# Altium PCB PCB4.PcbDoc
Units mil, origin at the board's own origin, x right, y up, seen from the top; angles counter-clockwise.
Board outline 3160 x 980 mil, 4 copper layers (Top Layer, Layer 1, Layer 2, Bottom Layer), stack 24.956 mil thick; 40 components, 27 nets, 201 pads, 55 vias.
Unrouted connection lines stored in the file: 4.
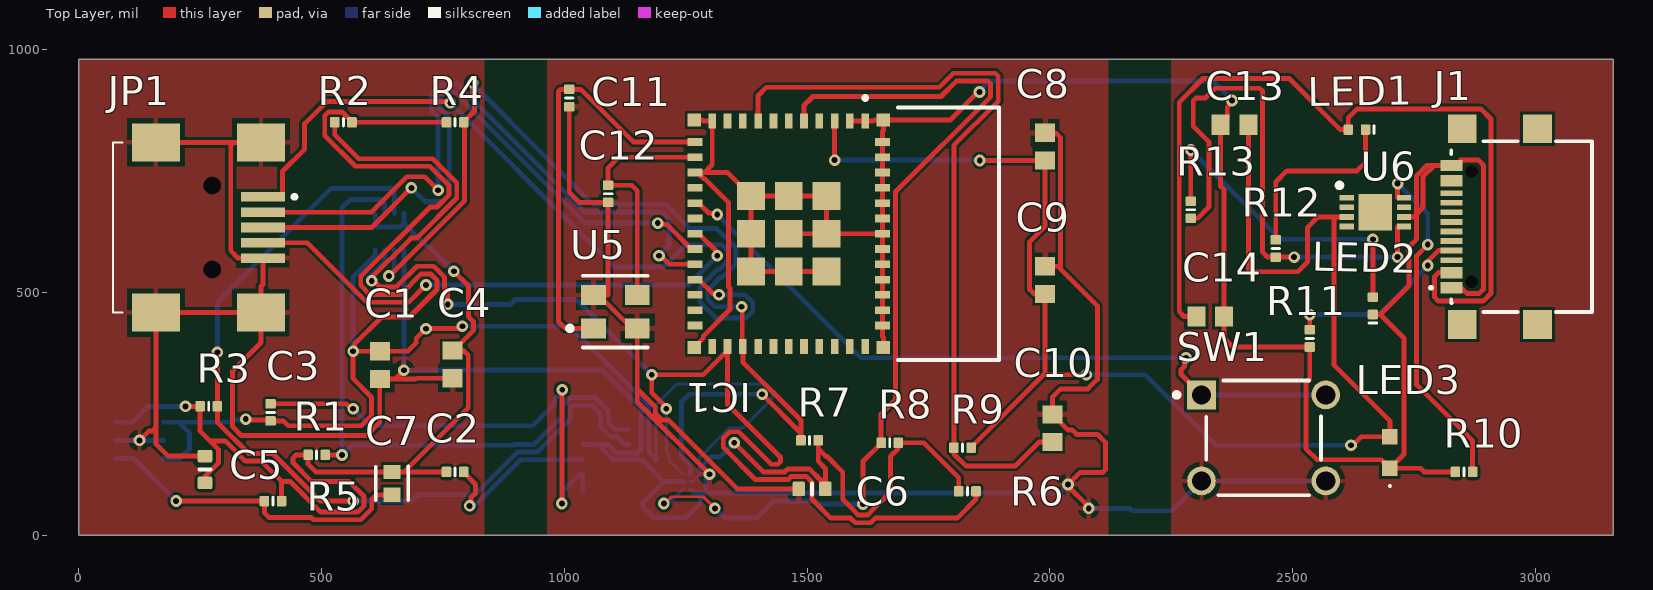
[diagram p0: Top Layer view]
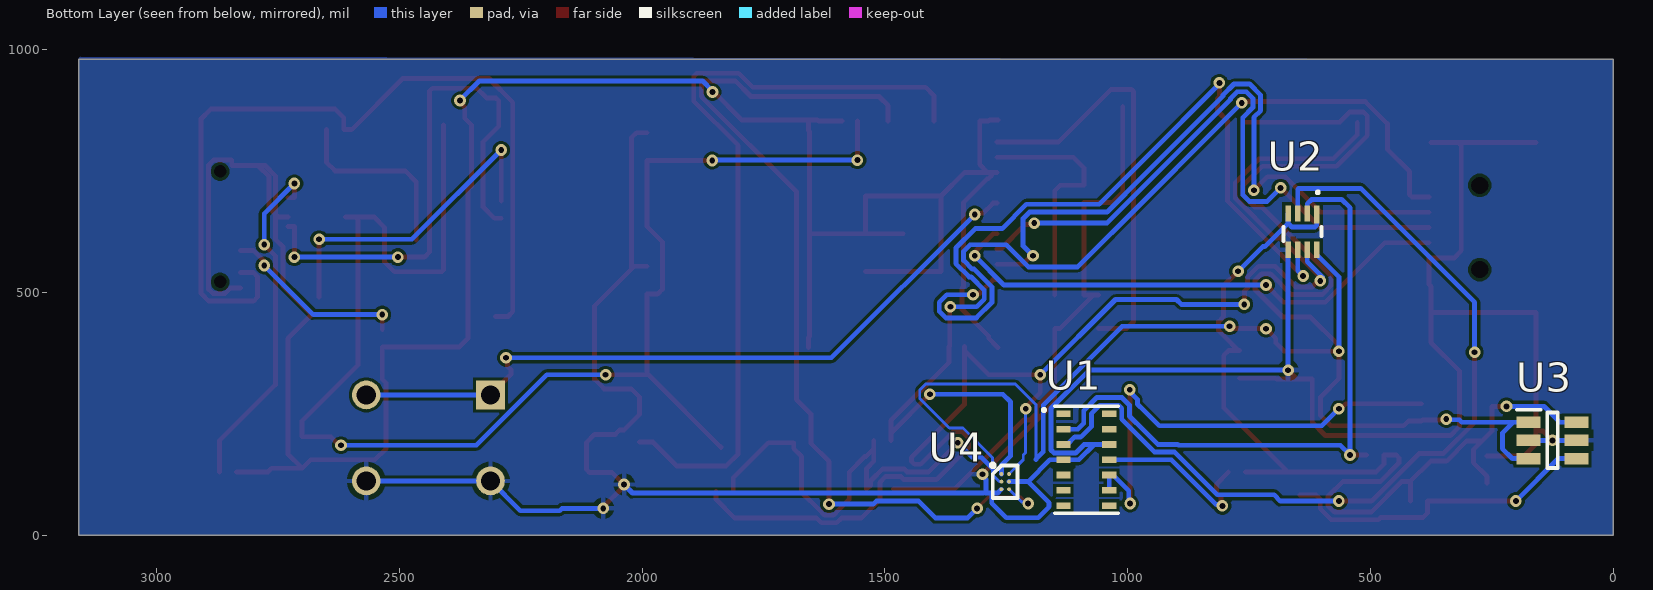
[diagram p1: Bottom Layer view, seen from below]
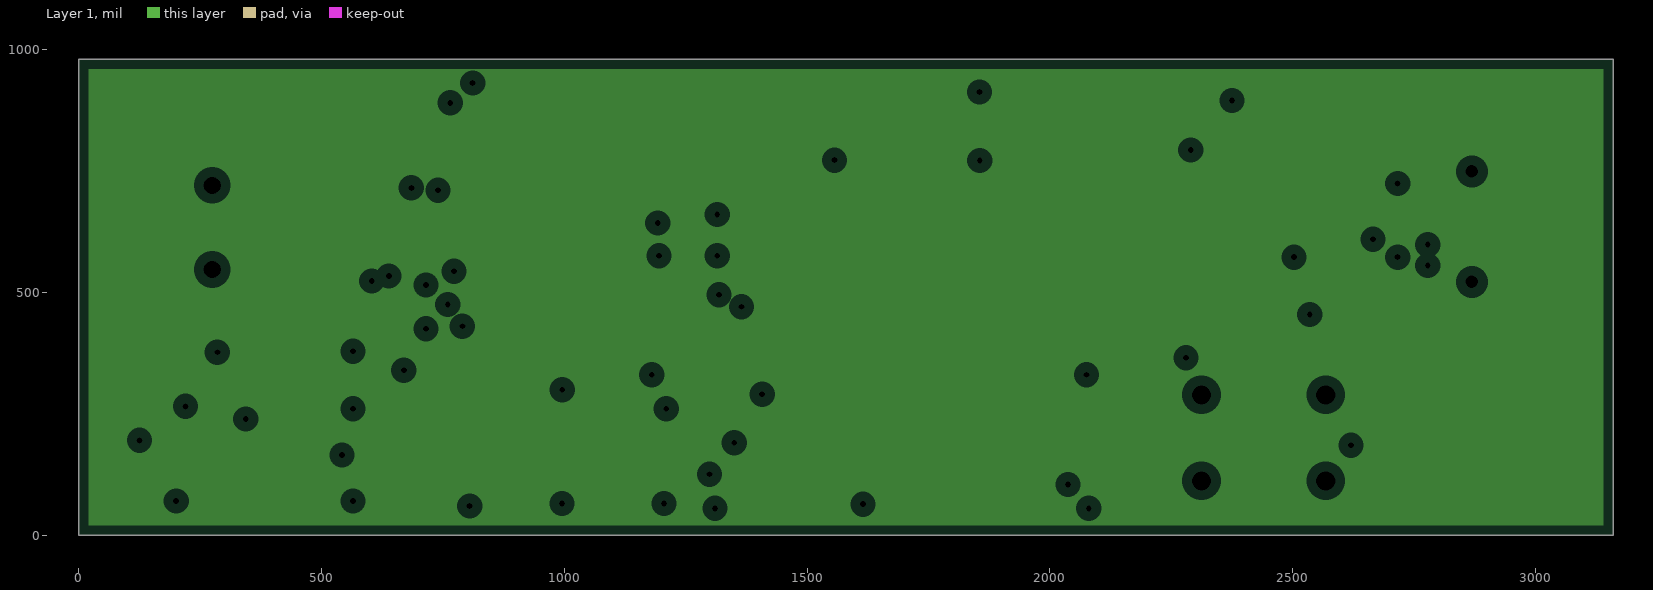
[diagram p2: Layer 1, clearances drawn from the general rule]
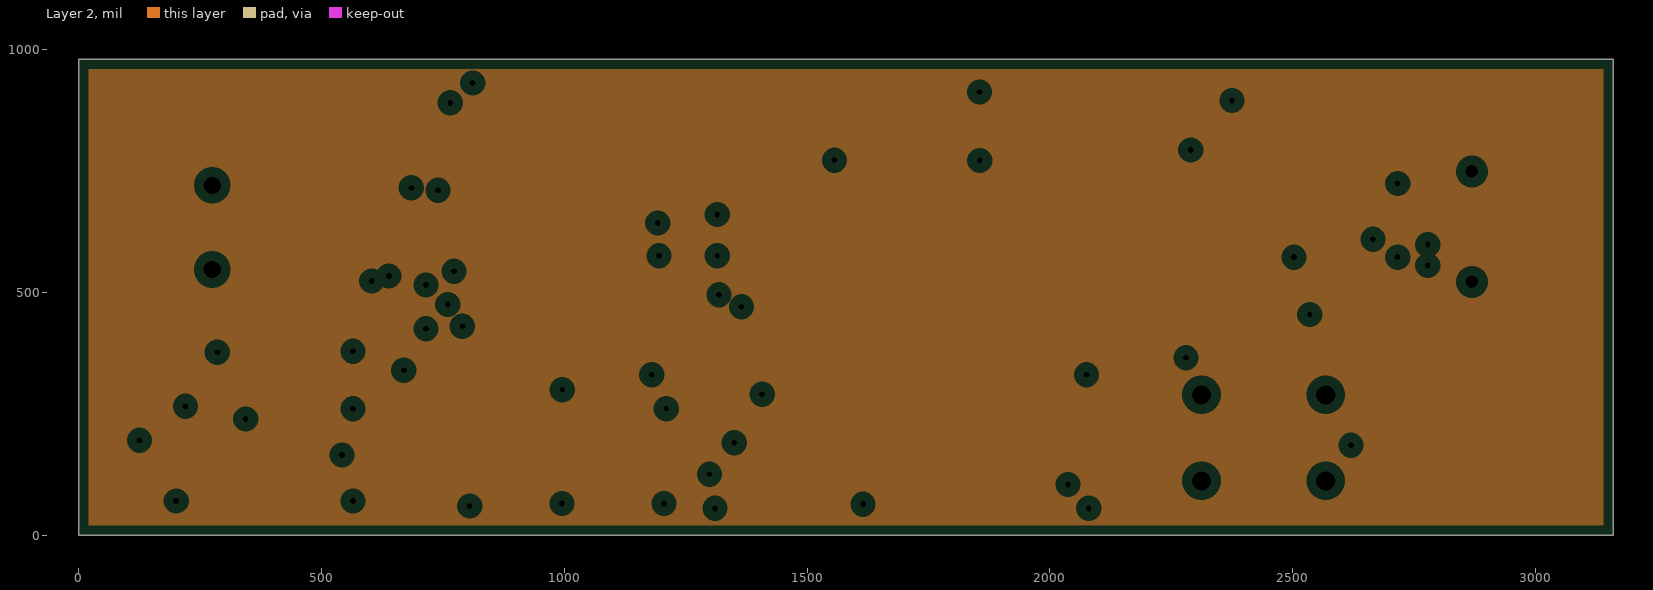
[diagram p3: Layer 2, clearances drawn from the general rule]
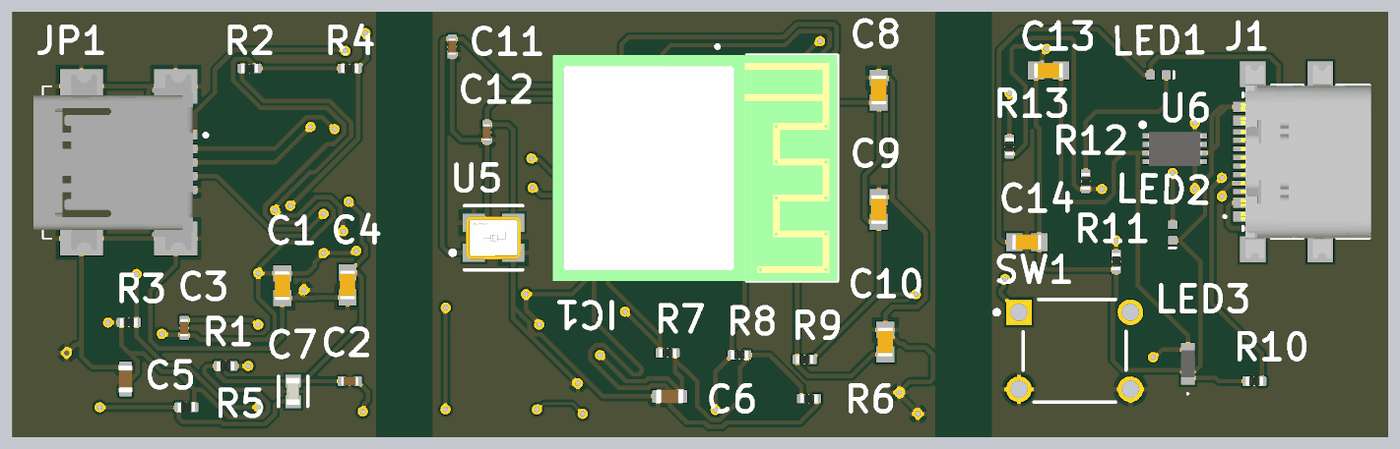
[diagram p4: 3D render of the assembled board from above, using the file's embedded part models]
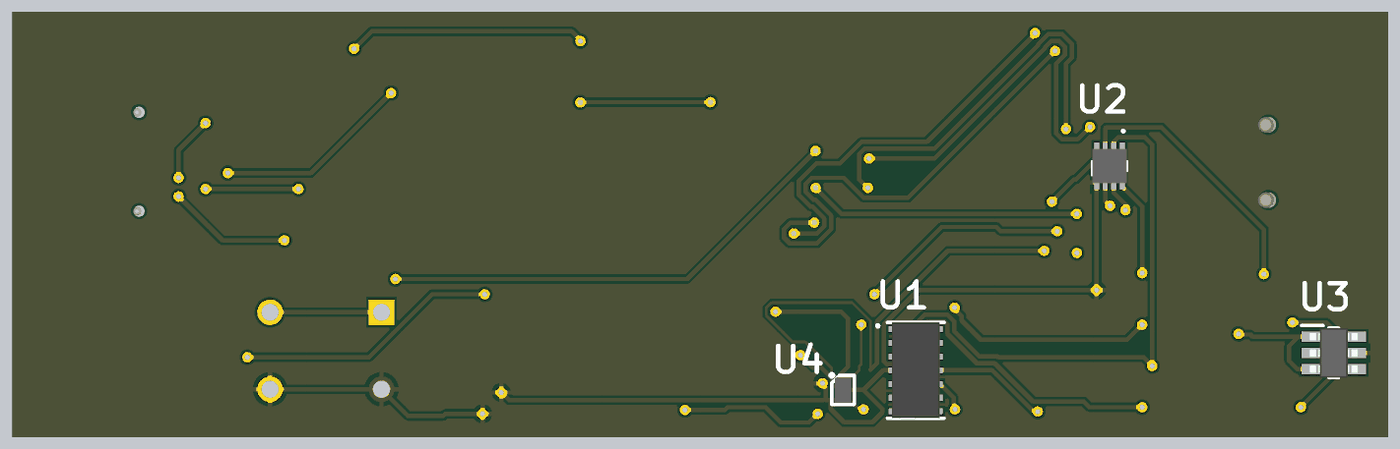
[diagram p5: 3D render of the assembled board from below, using the file's embedded part models]

## Layer stack, top to bottom
Top Solder: solder mask 0.472, FC-001, Dk 4
Top Solder: solder mask 0.4, Solder Resist, Dk 3.5
Top Layer: signal copper 2
Dielectric 2: prepreg 2.8, PP-006, Dk 4.1
Layer 1: plane copper 1.378
Dielectric 1: dielectric 12.6, FR-4, Dk 4.8
Layer 2: plane copper 1.378
Dielectric 3: prepreg 2.8, PP-006, Dk 4.1
Bottom Layer: signal copper 2
Flex Bottom Coverlay: solder mask 0.4, Solder Resist, Dk 3.5
Flex Bottom Coverlay: solder mask 0.472, FC-001, Dk 4

## Board outline
0,0 3160,0 3160,980 0,980
board region "Layer Stack R3": 845,0 0,0 0,980 845,980
board region "Layer Stack R1": 2240,980 3160,980 3160,0 2240,0
board region Flex2: 2130,980 2240,980 2240,0 2130,0
board region "Layer Stack R2": 955,980 2130,980 2130,0 955,0
board region Flex1: 845,980 955,980 955,0 845,0

## Design rules (kind name [scope] priority, off if disabled: settings)
Clearance Polygon_ANT [(InNamedPolygon('Top_Layer-GND')) or  (InNamedPolygon('Mid_Layer_1-GND')) or (InNamedPolygon('Mid_Layer_2-GND')) or (InNamedPolygon('Bottom_Layer-GND')) vs InNet('RF')] p1: gap=10 ignorepadtopadclearanceinfootprint=FALSE
Clearance Polygon [(InNamedPolygon('Top_Layer-GND')) or  (InNamedPolygon('Mid_Layer_1-GND')) or (InNamedPolygon('Mid_Layer_2-GND')) or (InNamedPolygon('Bottom_Layer-GND'))] p2: gap=10 ignorepadtopadclearanceinfootprint=FALSE except(0: Arc-Hole Track-Hole SMDPad-Hole THPad-Hole Via-Hole Fill-Hole Poly-Hole Region-Hole Text-Hole)
Clearance Clearance_Top [OnLayer('Top Layer')] p3: gap=5.71 ignorepadtopadclearanceinfootprint=FALSE except(0: Arc-Hole Track-Hole SMDPad-Hole THPad-Hole Via-Hole Fill-Hole Poly-Hole Region-Hole Text-Hole)
Clearance [All] p4: gap=5.91 ignorepadtopadclearanceinfootprint=FALSE
ComponentClearance [All] p1 off: gap=10 collisioncheckmode=3 verticalgap=10 showdistances=FALSE
DiffPairsRouting [All] p1: maxlimit=10 minlimit=10 mostfreqgap=10 toplayer_minwidth=15 toplayer_maxwidth=15 toplayer_prefwidth=15 bottomlayer_minwidth=15 bottomlayer_maxwidth=15 bottomlayer_prefwidth=15 substack1={EE8BA033-E28F-4276-8F34-0FAD93AC0668} toplayer_{ee8ba033-e28f-4276-8f34-0fad93ac0668}_minwidth=15 toplayer_{ee8ba033-e28f-4276-8f34-0fad93ac0668}_maxwidth=15 toplayer_{ee8ba033-e28f-4276-8f34-0fad93ac0668}_prefwidth=15 bottomlayer_{ee8ba033-e28f-4276-8f34-0fad93ac0668}_minwidth=15 bottomlayer_{ee8ba033-e28f-4276-8f34-0fad93ac0668}_maxwidth=15 bottomlayer_{ee8ba033-e28f-4276-8f34-0fad93ac0668}_prefwidth=15 maxuncoupledlength=500
FabricationTestPointUsage TestPointUsage [All] p1: valid=0 allowmultiple=FALSE
FabricationTestpoint Testpoint [All] p1: side=3 testpointundercomponent=TRUE minsize=40 maxsize=100 preferedsize=60 minholesize=0 maxholesize=40 preferedholesize=32 testpointgrid=1 allowsidetop=TRUE allowsidebottom=TRUE usegrid=TRUE gridtolerance=0.01
Height [All] p1 off: minheight=0 maxheight=1000 prefheight=500
HoleSize [All] p1: absolutevalues=TRUE maxlimit=396.22 minlimit=5.91 maxpercent=80.000 minpercent=20.000
MinimumAnnularRing [All] p1 off: minimumring=6
MinimumSolderMaskSliver [All] p1: minsoldermaskwidth=2
PlaneClearance [All] p1: clearance=20
PlaneConnect [All] p1: planeconnectstyle=Relief reliefexpansion=20 reliefentries=4 reliefconductorwidth=10 reliefairgap=10
PolygonConnect [All] p1: connectstyle=Relief reliefconductorwidth=10 reliefentries=4 polygonreliefangle="90 Angle" airgapwidth=10
RoutingVias [All] p1: holewidth=12 width=24 viastyle="Through Hole" minholewidth=3.94 minwidth=11.81 maxholewidth=12 maxwidth=24
SilkToSilkClearance [All] p1: silktosilkclearance=2
SilkToSolderMaskClearance SilkscreenOverComponentPads [IsPad] p1: minsilkscreentomaskgap=2 clearancetoexposedcopper=TRUE
SolderMaskExpansion [All] p1: expansion=2 istentingtop=FALSE
Width [OnLayer('Top Layer')] p1: maxlimit=20.08 minlimit=5.71 preferedwidth=10 substack1={EE8BA033-E28F-4276-8F34-0FAD93AC0668}
19 further rules are at their usual default settings.

## Classes and differential pairs
component class "Temp sensor": R6 R7 R8 U4
component class Protocol: JP1
component class Power: C13 C14 J1 LED1 LED2 LED3 R10 R11 R12 R13 U6
component class Microcontroller: C8 C9 C10 IC1 R9
component class "Heart rate and pulse oximeter": C1 C2 C3 C4 C5 C6 C7 R1 R2 R3 R4 R5 U1 U2 U3
component class "Crystal Oscillator": C11 C12 U5

## Components (designator, comment, footprint, x,y, rotation, side; value= is the part's Value field where it differs from the comment)
C1 "0.1uF" CAPC1608X90X35ML10T15 620,350 r90 top
C2 "Capacitor 1µF +/-20% 10V 0402" CAPC0402(1005)60_L 775,130 r0 top value=1µF
C3 "Capacitor 1µF +/-20% 10V 0402" CAPC0402(1005)60_L 395,252.72 r90 top value=1µF
C4 "0.1uF" CAPC1608X90X35ML10T15 770,351.46 r90 top
C5 "Capacitor 4.7µF +/-20% 10V 0603" CAPC0603(1608)100_L 260,135 r90 top value=4.7µF
C6 "Capacitor 4.7µF +/-20% 10V 0603" CAPC0603(1608)100_L 1510,95 r0 top value=4.7µF
C7 "5.6nF" FP-C0603C-CF-MFG 645,106.38 r90 top value="5,600 pF"
C8 "0.1uF" CAPC1608X90X35ML10T15 1990,800 r90 top
C9 "0.1uF" CAPC1608X90X35ML10T15 1990,525 r90 top
C10 "0.1uF" CAPC1608X90X35ML10T15 2005,220 r90 top
C11 "Capacitor 12pF +/-10% 50V 0402" CAPC0402(1005)33_L 1010,900 r90 top value=12pF
C12 "Capacitor 12pF +/-10% 50V 0402" CAPC0402(1005)33_L 1090,702.72 r90 top value=12pF
C13 "10uF" CAPC1608X90X35ML10T15 2380,845 r0 top
C14 "10uF" CAPC1608X90X35ML10T15 2330,450 r0 top
IC1 "ESP32-C3-MINI-1-H4" ESP32C3MINI1H4 1462.09,620.51 r270 top
J1 "GSB1C41110SSHR" GSB1C41110SSHR 2960,635 r90 top
JP1 "690-005-299-043" 690005299043 70.28,633.39 r0 top
LED1 "QBLP595-Y" QTB-QBLP595_V 2632.09,835 r180 top
LED2 "QBLP595-Y" QTB-QBLP595_V 2665,472.09 r90 top
LED3 "CSL1001BT1C" CSL1001BT1C 2700,170 r0 top
R1 "4D7KR2F" RESC0402(1005)_L 490,165 r0 top value=4.7k
R2 "4D7KR2F" RESC0402(1005)_L 545,850 r0 top value=4.7k
R3 "4D7KR2F" RESC0402(1005)_L 267.72,265 r0 top value=4.7k
R4 "4D7KR2F" RESC0402(1005)_L 775,850 r0 top value=4.7k
R5 "4D7KR2F" RESC0402(1005)_L 400,70 r0 top value=4.7k
R6 "Resistor 5K6  +/-5 % 0402 63 mW" RESC0402(1005)_L 1830,90 r180 top value=5.6k
R7 "Resistor 5K6  +/-5 % 0402 63 mW" RESC0402(1005)_L 1505,195 r0 top value=5.6k
R8 "Resistor 5K6  +/-5 % 0402 63 mW" RESC0402(1005)_L 1670,190 r0 top value=5.6k
R9 "Resistor 2K2  +/-5 % 0402 63 mW" RESC0402(1005)_L 1820,180 r0 top value=2.2k
R10 "2KR2J" RESC0402(1005)_L 2852.72,130 r180 top value=2k
R11 "Resistor 4K7  +/-1 % 0402 63 mW" RESC0402(1005)_L 2535,405 r90 top value=4.7k
R12 "1KR2J" RESC0402(1005)_L 2465,590 r90 top value=1k
R13 "Resistor 4K7  +/-1 % 0402 63 mW" RESC0402(1005)_L 2290,670 r90 top value=4.7k
SW1 "B3F-1000" OMRON-B3F-1000-4_V 2440,200 r0 top
U1 "MAX30102EFD+" 14-LEAD-OESIP 1085,155 r180 bottom
U2 "MAX14595ETA+" MAX14595ETA 640,625 r0 bottom
U3 "MAX1921EUT18+" SOT95P280X145-6N 125,195 r180 bottom
U4 "TMP119AIYBGR" BGA6C40P2X3_95X149X52 1252.13,110 r180 bottom
U5 "ABM8-27.120MHZ-B4-T" FP-ABM8-MFG 1105,460 r0 top
U6 "MCP73831-2DCI_MC" SON50P300X200X100-9N-D 2670,665 r0 top

## Footprints (in the part's own frame and the unit in brackets; to place one, negate y for a bottom-side part, rotate by r counter-clockwise, add the part's x,y. Pads: shape width x height; smd on the part's side, far side on the other; paste and mask are expansions set on the pad)
14-LEAD-OESIP [mm]
  rect 0.75x0.35 smd: 1(-1.2,2.4) 2(-1.2,1.6) 3(-1.2,0.8) 4(-1.2,0) 5(-1.2,-0.8) 6(-1.2,-1.6) 7(-1.2,-2.4) 8(1.2,-2.4) 9(1.2,-1.6) 10(1.2,-0.8) 11(1.2,0) 12(1.2,0.8) 13(1.2,1.6) 14(1.2,2.4)
  silkscreen extent -2.28,-2.8 1.65,2.8, body extent -1.4,-2.8 1.4,2.8, height 1.3
690005299043 [mm]
  rect 2.3x0.5 smd: 1(7.85,1.6) 2(7.85,0.8) 3(7.85,0) 4(7.85,-0.8) 5(7.85,-1.6)
  rect 2.5x2 smd: 6(7.75,-4.45) 7(7.75,4.45) 8(2.25,4.45) 9(2.25,-4.45)
  round 0.45 hole 0.9 unplated: 10(5.2,2.2) 11(5.2,-2.2)
  silkscreen extent 0,-4.45 9.6,4.45, body extent -0.54,-5.13 8.76,5.13, height 3.9
BGA6C40P2X3_95X149X52 [mm]
  round 0.2 smd: A1(-0.2,0.4) A2(0.2,0.4) B1(-0.2,0) B2(0.2,0) C1(-0.2,-0.4) C2(0.2,-0.4)
  silkscreen extent -0.75,-0.85 0.65,0.95, body extent -0.48,-0.74 0.48,0.74, height 0.53
CAPC0402(1005)33_L [mm] "Chip Capacitor, Body 1.0x0.5mm, Height 0.33mm, IPC High Density"
  rrect25% 0.5x0.55 smd: 1(-0.45,0) 2(0.45,0)
  silkscreen extent 0,-0.2 0,0.2, body extent -0.5,-0.25 0.5,0.25, height 0.55
CAPC0402(1005)60_L [mm] "Chip Capacitor, Body 1.0x0.5mm, Height 0.6mm, IPC High Density"
  rrect25% 0.5x0.55 smd: 1(-0.45,0) 2(0.45,0)
  silkscreen extent 0,-0.2 0,0.2, body extent -0.5,-0.25 0.5,0.25, height 0.6
CAPC0603(1608)100_L [mil] "Chip Capacitor, Body 1.6x0.8mm, Height 1.0mm, IPC High Density"
  rrect25% 26x29.92 smd: 1(-27.56,0) 2(27.56,0)
  silkscreen extent 0,-12 0,12, body extent -31,-16 31,16, height 37
CAPC1608X90X35ML10T15 [mm] "Chip Capacitor, 2-Leads, Body 1.7x0.9mm, IPC Low Density"
  rect 0.95x1.05 smd: 1(-0.725,0) 2(0.725,0)
  body extent -0.85,-0.45 0.85,0.45, height 0.9
CSL1001BT1C [mm]
  rect 0.8x0.8 smd: 1(0,-0.825) 2(0,0.825)
  silkscreen extent -0.05,-1.8 0.05,-1.7, body extent -0.4,-0.8 0.4,0.8, height 1.26
ESP32C3MINI1H4 [mm]
  rect 0.8x0.4 smd: 1(-5.9,4) 2(-5.9,3.2) 3(-5.9,2.4) 4(-5.9,1.6) 5(-5.9,0.8) 6(-5.9,0) 7(-5.9,-0.8) 8(-5.9,-1.6) 9(-5.9,-2.4) 10(-5.9,-3.2) 11(-5.9,-4) 25(5.9,-4) 26(5.9,-3.2) 27(5.9,-2.4) 28(5.9,-1.6) 29(5.9,-0.8) 30(5.9,0) 31(5.9,0.8) 32(5.9,1.6) 33(5.9,2.4) 34(5.9,3.2) 35(5.9,4)
  rect 0.4x0.8 smd: 12(-4.8,-4.9) 13(-4,-4.9) 14(-3.2,-4.9) 15(-2.4,-4.9) 16(-1.6,-4.9) 17(-0.8,-4.9) 18(0,-4.9) 19(0.8,-4.9) 20(1.6,-4.9) 21(2.4,-4.9) 22(3.2,-4.9) 23(4,-4.9) 24(4.8,-4.9) 36(4.8,4.9) 37(4,4.9) 38(3.2,4.9) 39(2.4,4.9) 40(1.6,4.9) 41(0.8,4.9) 42(0,4.9) 43(-0.8,4.9) 44(-1.6,4.9) 45(-2.4,4.9) 46(-3.2,4.9) 47(-4,4.9) 48(-4.8,4.9)
  rect 1.45x1.45 smd: 49(0,0) 50(1.975,1.975) 51(0,1.975) 52(-1.975,1.975) 53(-1.975,0) 54(-1.975,-1.975) 55(0,-1.975) 56(1.975,-1.975) 57(1.975,0)
  rect 0.7x0.7 smd: 58(-5.95,4.95) 59(-5.95,-4.95) 60(5.95,-4.95) 61(5.95,4.95)
  silkscreen extent -7.2,3.9 6.6,11, body extent -6.6,-5.6 6.6,11, height 2.4
FP-ABM8-MFG [mm]
  rect 1.3x1.05 smd paste+0 mask+0: 1(-1.15,-0.875) 2(1.15,-0.875) 3(1.15,0.875) 4(-1.15,0.875)
  silkscreen extent -2.5,-1.87 1.7,1.87, body extent -1.9,-1.5 1.9,1.5, height 0.25
FP-C0603C-CF-MFG [mm]
  rect 0.75x0.9 smd paste+0 mask+0: 1(-0.6,0) 2(0.6,0)
  silkscreen extent -0.87,-0.85 0.88,0.85, body extent -1.2,-0.6 1.2,0.6, height 0.25
GSB1C41110SSHR [mm]
  rect 0.6x1.15 smd: A1(-3.2,3.39) A4(-2.4,3.39) A9(2.4,3.39) A12(3.2,3.39)
  rect 0.3x1.15 smd: A5(-1.25,3.39) A6(-0.25,3.39) A7(0.25,3.39) A8(1.25,3.39) B5(1.75,3.39) B6(0.75,3.39) B7(-0.75,3.39) B8(-1.75,3.39)
  round 0.325 hole 0.65 unplated: MH1(-2.89,2.315) MH2(2.89,2.315)
  rect 1.5x1.5 smd: MP1(-5.12,2.815) MP2(5.12,2.815) MP3(-5.12,-1.115) MP4(5.12,-1.115)
  silkscreen extent -4.47,-3.96 4.47,4.5, body extent -5.67,-4.09 5.67,3.51, height 3.12
MAX14595ETA [mm]
  rect 0.3x0.95 smd: 1(-0.75,-0.9)
  rect 0.3x0.85 smd: 2(-0.25,-0.95) 3(0.25,-0.95) 4(0.75,-0.95) 5(0.75,0.95) 6(0.25,0.95) 7(-0.25,0.95) 8(-0.75,0.95)
  silkscreen extent -1,-2.1 1,0.5, body extent -1,-1 1,1, height 0.9
OMRON-B3F-1000-4_V [mm] "TH, 4-Leads, Body 6x6mm"
  rect 1.5x1.5 hole 1 paste-2539.97: 1(-3.25,2.25)
  round 1.5 hole 1 paste-2539.97: 2(3.25,2.25) 4(3.25,-2.25)
  round 1.5 hole 1 paste-2539.97 mask+0.102: 3(-3.25,-2.25)
  silkscreen extent -4.67,-3 3,3, body extent -3,-3 3,3, height 4.5
QTB-QBLP595_V [mm] "SMD, 2-Leads, Body 1x0.5mm"
  rrect25% 0.5x0.55 smd: 1(-0.455,0) 2(0.455,0)
  silkscreen extent -0.9,-0.2 -0.9,0.2, body extent -0.5,-0.25 0.5,0.25, height 0.5
RESC0402(1005)_L [mm] "Chip Resistor, Body 1.0x0.5mm, IPC High Density"
  rrect25% 0.5x0.55 smd: 1(-0.45,0) 2(0.45,0)
  silkscreen extent 0,-0.2 0,0.2, body extent -0.5,-0.25 0.5,0.25, height 0.3
SON50P300X200X100-9N-D [mm]
  rect 0.75x0.3 smd: 1(-1.5,0.75) 2(-1.5,0.25) 3(-1.5,-0.25) 4(-1.5,-0.75) 5(1.5,-0.75) 6(1.5,-0.25) 7(1.5,0.25) 8(1.5,0.75)
  rect 1.75x1.9 smd: 9(0,0)
  silkscreen extent -2,1.28 -1.75,1.52, body extent -1.55,-1 1.55,1, height 1
SOT95P280X145-6N [mm]
  rect 1.25x0.6 smd: 1(-1.25,0.95) 2(-1.25,0) 3(-1.25,-0.95) 4(1.25,-0.95) 5(1.25,0) 6(1.25,0.95)
  silkscreen extent -1.87,-1.45 0.27,1.6, body extent -1.4,-1.45 1.4,1.45, height 1.45

## Part data
C1 C4 C8 C9 C10 C13 C14: library part CMP-2100-03643-1, "Chip Capacitor, 0.1 uF, +/- 10%, 50 V, -55 to 125 degC, 0603 (1608 Metric), RoHS, Tape and Reel", Capacitance=100nF, Case Code (Imperial)=0603, Case Code (Metric)=1608, Dielectric=X7R, Dielectric Material=Ceramic, Insulation Resistance=10GR, Manufacturer=Murata, Max Operating Temperature=125degC, Min Operating Temperature=-55degC, Package Description="2-Pin Surface Mount Device, Body 1.6 x 0.8 mm", Package Quantity=1, Tolerance=10%, Voltage=50V, Case/Package=0603, Contact Plating=Tin, Datasheet URL=http://psearch.en.murata.com/capacitor/product/GRM188R71H104KA93%23.pdf, Datasheet Version=42675.0, Depth=0.8mm, Height=0.8mm, Lead Free=LeadFree, Length=1.6mm, Manufacturer URL=http://www.murata.com/, Material=Ceramic, Mount=SurfaceMount, Number of Pins=2, Package Reference=0603, Packaging=TapeandReel, Radiation Hardening=No, REACH SVHC=NoSVHC, RoHSCompliant=true, Termination=SMD/SMT, Thickness=0.035inch, Voltage Rating=50V, Voltage Rating (DC)=50V, Width=0.8mm
C2 C3: library part CMP-001-00063-3, "Chip Capacitor, 1µF +/-20%, 10V, 0402, Thickness 0.6 mm", Case/Package=0402, Max Operating Temperature=85°C, Min Operating Temperature=-55°C, Tolerance=10%, Voltage Rating=10V, Mounting Technology=SMT, Pins=2
C5 C6: library part CMP-001-00076-4, "Chip Capacitor, 4.7µF +/-20%, 10V, 0603, Thickness 1 mm", Case/Package=0603, Max Operating Temperature=85°C, Min Operating Temperature=-55°C, Tolerance=10%, Voltage Rating=10V, Mounting Technology=SMT, Pins=2
C7: library part CMP-2006-03359-2, "CAP CER 5600PF 50V NP0 0603", Capacitance="5,600 pF", Manufacturer=KEMET, Manufacturer Part Number=C0603C562J5GACTU, Package=C0603C-CF, Temperature="-55°C to +125°C", Temperature Characteristic=C0G, Temperature Coefficient=30ppm/°C, Temperature Range High=+125°C, Temperature Range Low=-55°C, Tolerance=0.05, Voltage Rating="50 V", Automotive=Yes, Automotive Grade="Grade 1", Category=Cap, ComponentLink2Description=Datasheet, ComponentLink2URL=https://api.kemet.com/component-edge/download/datasheet/C0603C100J5GACAUTO.pdf, Device Class L1="Passive Components", Device Class L2=Capacitors, Device Class L3="Ceramic Capacitors", Digikey Description="CAP CER 5600PF 50V NP0 0603", Height=0.87mm, Lead Free=Yes, Material=Ceramic, Mouser Description="Multilayer Ceramic Capacitors MLCC - SMD/SMT 50volts 5600pF 5% C0G", Octopart=https://octopart.com/c0603c562j5gactu-kemet-13174209, RoHS=TRUE
C11 C12: library part CMP-001-00072-4, "Chip Capacitor, 12pF +/-10%, 50V, 0402, Thickness 0.33 mm", Case/Package=0402, Max Operating Temperature=85°C, Min Operating Temperature=-55°C, Tolerance=20%, Voltage Rating=50V, Mounting Technology=SMT, Pins=2
IC1: "Integrated Circuit", Manufacturer_Name="Espressif Systems", Mouser Part Number=356-ESP32-C3-MINI1H4, Datasheet Link=https://www.mouser.es/datasheet/2/891/Espressif_ESP32_C3_MINI_1_Datasheet-2006822.pdf, Height=2.55mm, Manufacturer_Part_Number=ESP32-C3-MINI-1-H4, Mouser Price/Stock=https://www.mouser.co.uk/ProductDetail/Espressif-Systems/ESP32-C3-MINI-1-H4?qs=stqOd1AaK78JkwNX13Q9hQ%3D%3D
J1: "Connector", Manufacturer_Name="Amphenol Communications Solutions", Datasheet Link=https://cdn.amphenol-cs.com/media/wysiwyg/files/drawing/gsb1c41x10sshr-ax1.pdf, Height=3.41mm, Manufacturer_Part_Number=GSB1C41110SSHR
JP1: "Connector", Manufacturer_Name=EDAC, Mouser Part Number=587-690-005-299-043, Datasheet Link=https://datasheet.datasheetarchive.com/originals/distributors/Datasheets-DGA2/216278.pdf, Height=3.98mm, Manufacturer_Part_Number=690-005-299-043, Mouser Price/Stock=https://www.mouser.co.uk/ProductDetail/EDAC/690-005-299-043?qs=Vpv2%252BhtnxQIs8OWWDFbyVg%3D%3D
LED1 LED2: library part CMP-007-00043-3, "Chip LED 0402, Yellow, 0.02 A, 3.1 to 3.7 V, -40 to 80 degC, 2-Pin SMD, RoHS, Tape and Reel", Case/Package=0402, Colour=Yellow, Mounting Technology=SMT, Pins=2, RoHS Compliant=Yes
LED3: "LED", Manufacturer_Name="ROHM Semiconductor", Mouser Part Number=755-CSL1001BT1C, Datasheet Link=https://fscdn.rohm.com/en/products/databook/datasheet/opto/led/chip_mono/csl1001bt1(c)-e.pdf, Height=1.16mm, Manufacturer_Part_Number=CSL1001BT1C, Mouser Price/Stock=https://www.mouser.co.uk/ProductDetail/ROHM-Semiconductor/CSL1001BT1C?qs=HoCaDK9Nz5fqNTX3Pg0ReA%3D%3D
R1 R2 R3 R4 R5: library part CMP-009-00105-2, "4K7 0.063W 1% 0402 (1005 Metric)  SMD", Case/Package=0402, Power=63mW, Tolerance=1%, Mounting Technology=SMT, Pins=2
R6 R7 R8: library part CMP-009-00136-3, "Chip Resistor, 5,6 kOhms, +/-5 %, 63 mW, -55 to 155 degC, 0402", Case/Package=0402, Max Operating Temperature=155°C, Min Operating Temperature=-55°C, Power=63mW, Tolerance=5%, Pins=2
R9: library part CMP-009-00166-3, "Chip Resistor, 2,2 kOhms, +/-5 %, 63 mW, -55 to 155 degC, 0402", Case/Package=0402, Max Operating Temperature=155°C, Min Operating Temperature=-55°C, Power=63mW, Tolerance=5%, Pins=2
R10: library part CMP-009-00091-2, "2K 0.063W 5% 0402 (1005 Metric)  SMD", Case/Package=0402, Power=63mW, Tolerance=5%, Mounting Technology=SMT, Pins=2
R11 R13: library part CMP-009-00158-3, "Chip Resistor, 4,7 kOhms, +/-1 %, 63 mW, -55 to 155 degC, 0402", Case/Package=0402, Max Operating Temperature=155°C, Min Operating Temperature=-55°C, Power=63mW, Tolerance=1%, Pins=2
R12: library part CMP-009-00075-2, "1K 0.063W 5% 0402 (1005 Metric)  SMD", Case/Package=0402, Power=63mW, Tolerance=5%, Mounting Technology=SMT, Pins=2
SW1: library part CMP-1677-00002-1, "Tactile Switch, SPST-NO, 0.05 A, 5 to 24 V, -25 to 70 degC, 4-Pin THD, RoHS, Bulk", Capacitance="-45 f", Current Rating="1.5 A", Max Operating Temperature="70 degC", Min Operating Temperature="-40 degC", Package Quantity=1080, Voltage Rating="150 V", ComponentLink1Description="Manufacturer URL", ComponentLink1URL=http://www.omron.com/, ComponentLink2Description=Datasheet, ComponentLink2URL=http://www.omron.com/ecb/products/pdf/en-b3f.pdf, Contact Material=Brass, Contact Plating=Gold, DatasheetVersion=Jan-15, Gender=Female, Height="14.99 mm", Lead Pitch="1.27 mm", Length="18.34 mm", Mount="Through Hole", PackageDescription="4-Pin Through Hole Device, Body 6 x 6 mm", PackageReference=B3F-1000, Packaging=Tray, Pins=8, Radiation Hardening=No, RoHSCompliant=true, Shielding=Shielded, Width="25.4 mm"
U1: "Integrated Circuit", Manufacturer_Name="Analog Devices", Mouser Part Number=700-MAX30102EFD+, Datasheet Link=https://datasheets.maximintegrated.com/en/ds/MAX30102.pdf, Manufacturer_Part_Number=MAX30102EFD+, Mouser Price/Stock=https://www.mouser.co.uk/ProductDetail/Analog-Devices-Maxim-Integrated/MAX30102EFD%2b?qs=nVS1qgv%252BQrk9UYEvS27V%2Fg%3D%3D
U2: "Integrated Circuit", Manufacturer_Name="Analog Devices", Mouser Part Number=700-MAX14595ETA+, Datasheet Link=https://www.mouser.it/datasheet/2/256/MAX14595-471922.pdf, Height=0.8mm, Manufacturer_Part_Number=MAX14595ETA+, Mouser Price/Stock=https://www.mouser.co.uk/ProductDetail/Maxim-Integrated/MAX14595ETA%2b?qs=Or6ezLSzmEvDejm1TC8ZVA%3D%3D
U3: "Integrated Circuit", Manufacturer_Name="Analog Devices", Datasheet Link=https://datasheet.datasheetarchive.com/originals/distributors/SFDatasheet-4/sf-00087114.pdf, Height=1.45mm, Manufacturer_Part_Number=MAX1921EUT18+
U4: "Integrated Circuit", Manufacturer_Name="Texas Instruments", Mouser Part Number=595-TMP119AIYBGR, Datasheet Link=https://www.ti.com/lit/ds/symlink/tmp119.pdf?ts=1711471230059&ref_url=https%253A%252F%252Fwww.ti.com%252Fsitesearch%252Fen-us%252Fdocs%252Funiversalsearch.tsp%253FlangPref%253Den-US%2526searchTerm%253Dtmp119%2526nr%253D70, Height=0.525mm, Manufacturer_Part_Number=TMP119AIYBGR, Mouser Price/Stock=https://www.mouser.co.uk/ProductDetail/Texas-Instruments/TMP119AIYBGR?qs=dbcCsuKDzFUz%2FSabBerKMA%3D%3D
U5: library part CMP-27762-000994-1, "Crystal 27.12MHz ±30ppm 18pF SMD-4 3.2mm x 2.5mm", Capacitance=1.8E-11F, Case/Package=SMD/SMT, ESR (Equivalent Series Resistance)=50R, Frequency=27.12MHz, Frequency Stability=50ppm, Frequency Tolerance=30ppm, Load Capacitance=18pF, Max Operating Temperature=70°C, Min Operating Temperature=-20°C, Height=0.031inch, Lead Free="Lead Free", Length=0.126inch, Mount="Surface Mount", Packaging="Tape and Reel", RoHS Compliant=Yes, Width=0.098inch
U6: "Integrated Circuit", Arrow Part Number=MCP73831-2DCI/MC, Manufacturer_Name=Microchip, Mouser Part Number=579-MCP73831-2DCI/MC, Arrow Price/Stock=https://www.arrow.com/en/products/mcp73831-2dcimc/microchip-technology?region=nac, Datasheet Link=https://www.arrow.com/en/products/mcp73831-2dcimc/microchip-technology, Height=1mm, Manufacturer_Part_Number=MCP73831-2DCI/MC, Mouser Price/Stock=https://www.mouser.co.uk/ProductDetail/Microchip-Technology/MCP73831-2DCI-MC?qs=hH%252BOa0VZEiBQ%2FrptDRXKdg%3D%3D

## Via types
v1: diameter 24, hole 12, Top Layer to Bottom Layer, 55 vias

## Nets (pads, with @x,y where several pads share a name; then routed paths per layer and width w, separated by ;. In a path a pad name is that pad's centre, name@x,y a point inside that pad or via, vN(x,y) a via of type N, cw(c..) or ccw(c..) an arc to the next point about the centre after c; other vN are vias at no path point)
1.8V: C2.1 C4.2 C5.1 C7.2 R1.1 R3.1 R5.2 U2.1 U2.4 U3.6 | length 2123.5
  Top Layer w10: v1(220,265) R3.1 250,214 270,194 ; C5.1 260,121 288,149 288,176 270,194 ; R5.2 417.72,110.5 ; C2.1 670,130 ; C4.2 792,380 802,370 802,262 670,130 ; C4.2@771.97,380 799.26,407.29 799.41,407.29 812.71,420.59 812.71,439.41 802.71,449.41 802.71,512.99 v1(772.54,543.16) ; 270,194 301.57,194 343.32,152.25 375.97,152.25 417.72,110.5 ; 417.72,110.5 435.07,110.5 498.28,47.29 574.41,47.29 587.71,60.59 587.71,79.41 557.11,110 480,110 441.58,148.42 441.58,159.14 447.44,165 R1.1 472.28,146 488.28,130 C7.2 670,130
  Bottom Layer w10: U3.6 110,232.4 142.6,265 v1(220,265) ; U2.1 610.47,638 614.47,634 661.53,634 669.53,642 ; U2.4 669.53,642 ; v1(772.54,543.16) 721.78,593.92 717.61,593.92 669.53,642
CHIP_EN: C10.1 IC1.8 R9.1 | length 1617.4
  Top Layer w10: IC1.8 1399.09,905.09 1416,922 1772.25,922 1801.16,950.91 1887.56,950.91 1893.42,945.05 1893.42,893.42 1802.28,802.28 R9.1 1802.28,166.92 1827.21,142 1928,142 1977.46,191.46 C10.1
GND: C1.1 C4.1 C5.2 C6.1 C8.2 C9.2 C10.2 C11.1 C12.1 JP1.5 JP1.6 JP1.7 JP1.8 JP1.9 SW1.3 SW1.4 U1.4 U1.12 U2.5 U3.2 U3.5 U4.B2 U4.C1 U5.2 U5.4 | length 7450.4
  Top Layer w10: v1(125,195) 144.13,214.13 151.13,214.13 158.86,221.86 ; JP1.8 319.58,808.58 ; C5.2 184,162.56 158.86,187.7 158.86,221.86 ; JP1.7 319.58,808.58 ; v1(669.53,339.53) 651.46,321.46 ; C4.1 695.46,322.91 694,321.46 651.46,321.46 ; C11.1 1010,706 1031,685 C12.1 1090,494.45 U5.4@1070,494.45 ; U5.4 U5.4@1070,494.45 ; v1(1299.01,125.26) 1150.28,274 1150.28,300.72 ; C6.1 1356,95 1213.71,237.29 1200.59,237.29 1187.29,250.59 1187.29,263.71 1150.28,300.72 ; C9.2 2016,553.54 2022,547.54 ; C8.2 2011.46,828.54 2022,818 2022,547.54 ; v1(2080,55) 2080,58 2037,101 v1(2037,104) 2061.64,128.64 2108.43,128.64 2114.29,134.49 2114.29,190.71 2097.84,207.16 2054.95,207.16 2045.57,216.54 2037,216.54 C10.2 2005,284 2022,301 2078.11,301 2097.71,320.59 2097.71,471.84 2022,547.54 ; 158.86,221.86 JP1.9 JP1.6 ; 319.58,808.58 313,802 313,585.39 328,570.39 JP1.5 379.33,515.94 375.39,512 JP1.6 ; JP1.6 375.39,396.39 317,338 317,223 335,205 593,205 620,232 C1.1 651.46,321.46 ; U5.4@1070,494.45 1138.9,425.55 U5.2 1150.28,300.72
  Bottom Layer w10: U3.5 U3.2 ; U2.5 v1(669.53,339.53) 1079.28,339.53 1157.91,260.89 1157.91,175.09 1151.53,168.7 1107.48,168.7 1089.68,186.5 1069,186.5 ; U1.12 1069,186.5 ; U4.B2 1205,110 ; U4.C1 1267.67,86.58 1280,86.58 ; 1296.85,86.58 2019.58,86.58 v1(2037,104) ; v1(1299.01,125.26) 1299.01,121.48 1292.01,114.48 1292.01,86.58 1280,86.58 ; v1(2080,55) 2125,55 2164.71,55 2169.71,50 2245,50 2250.63,50 SW1.3 SW1.4 ; 1069,186.5 1100.5,155 U1.4 1160,155 1205,110 ; 1205,110 1161.64,66.64 1161.64,58.36 1184.31,35.69 1250.02,35.69 1280,65.67 1280,86.58
GPIO2: IC1.5 R8.1 U4.C2 | length 1916.2
  Top Layer w6: v1(1205,65) 1207.08,65 1220.89,78.81 1286.19,78.81 v1(1310,55)
  Top Layer w10: IC1.5 1493.58,884.75 1512,903.16 1775.63,903.16 1807.67,935.2 1871.85,935.2 1877.71,929.35 1877.71,902.71 1682,707 1682,279 1652.28,249.28 R8.1 1652.28,189.02 1615,151.73 v1(1615,63.67)
  Bottom Layer w6: v1(1205,65) 1208.44,68.44 1218.44,68.44 U4.C2
  Bottom Layer w10: v1(1310,55) 1330,35 1395.61,35 1430.61,70 1517.75,70 1524.07,63.67 v1(1615,63.67)
GPIO18: IC1.26 R2.1 R6.1 U2.7 U4.A2 | length 2918.4
  Top Layer w10: R2.1 527.28,824.17 576.41,775.04 729.29,775.04 778.42,725.91 778.42,694.09 695.77,611.44 684.33,611.44 601.68,528.79 v1@601.68,521.68 ; v1(603.42,523.42) 607.21,523.42 619.71,510.91 654.06,510.91 696.56,553.42 730.91,553.42 753.42,530.91 753.42,508.14 759.56,502 759.56,475.44 v1(760,475) ; v1(1210,260) 1210,263.22 1180,293.22 v1(1180,330) 1285.75,330 IC1.26@1336.1,380.35 ; IC1.26 IC1.26@1336.1,380.35 ; R6.1 1847.72,74 1808.72,35 1640.66,35 1630.91,25.26 1599.09,25.26 1589.34,35 1549,35 1510,74 1510,108.64 1497.97,120.67 1466.91,120.67 1460.53,114.29 1393.59,114.29 1327.29,180.59 1327.29,199.41 1340.59,212.71 1359.41,212.71 1426.41,145.71 1439.29,145.71 1445.15,151.57 1445.15,159.85 1336.1,268.9 IC1.26@1336.1,380.35
  Bottom Layer w6: v1(1210,260) 1210,170 1215,165 1215,155 U4.A2
  Bottom Layer w10: v1(603.42,523.42) 603.42,527.21 599,531.62 599,531.84 630.16,563 U2.7 ; v1(760,475) 835,475 889.39,475 899.39,485 965,485 1025,485 v1(1180,330)
GPIO19: IC1.27 R4.2 R7.1 U2.6 U4.A1 | length 2192.6
  Top Layer w10: v1(638.62,533.62) 640.17,533.62 794.13,687.58 794.13,848.59 R4.2 ; R4.2@792.72,850.98 815,873.27 815,898.38 811.14,902.24 v1(811.14,931.14) ; v1(1365,470) 1366.3,468.7 1366.3,389.53 IC1.27 1367.6,356 1487.28,236.31 1487.28,210 ; v1(1407.28,290) 1487.28,210 ; R7.1 1487.28,210
  Bottom Layer w10: v1(638.62,533.62) 649.84,544.84 U2.6 ; v1(811.14,931.14) 811.14,928.86 965,775 1058.8,681.2 1208.47,681.2 1258.66,631.01 1313.87,631.01 1353.81,591.08 1353.81,558.92 1326.59,531.71 1322.65,531.71 1295.43,504.49 1295.43,485.51 1310.95,470 v1(1365,470) ; U4.A1 1260,144 1241,163 1241,274 1257,290 v1(1407.28,290)
NetC2_2: C2.2 U1.11 | length 357.2
  Top Layer w10: C2.2 792.72,129.02 817.09,104.64 817.09,85.88 807.68,76.47 807.68,62.68 v1(805,60)
  Bottom Layer w10: v1(805,60) 807.68,62.68 817.68,62.68 910,155 965,155 U1.11
NetC3_2: C3.2 U1.9 U1.10 | length 1005.2
  Top Layer w10: C3.2 550.78,270.43 561.21,260 v1(565,260) ; v1(995,65) 995,298.69 v1(995.65,299.35)
  Bottom Layer w10: v1(565,260) 600,225 835,225 935,225 965,255 979.87,269.87 979.87,279.78 995.65,295.56 v1(995.65,299.35) ; v1(995,65) 997.68,67.68 997.68,91.3 1029.88,123.5 U1.10 U1.9
NetC7_1: C7.1 R5.1 U3.4 | length 668.4
  Top Layer w10: v1(200.6,70) R5.1 382.28,45.72 392,36 479,36 483.42,31.58 580.91,31.58 603.42,54.09 603.42,73.89 612.28,82.76 C7.1
  Bottom Layer w10: U3.4 113,157.6 v1(200.6,70)
NetC13_1: C13.1 C14.2 IC1.1 IC1.2 IC1.11 IC1.14 IC1.36 IC1.37 IC1.38 IC1.39 IC1.40 IC1.41 IC1.42 IC1.43 IC1.44 IC1.45 IC1.46 IC1.47 IC1.48 IC1.49 IC1.50 IC1.51 IC1.52 IC1.53 IC1.54 IC1.55 IC1.56 IC1.57 IC1.58 IC1.59 IC1.60 IC1.61 J1.A1 J1.A12 LED2.1 LED3.1 R10.2 R11.1 U6.6 | length 5295.4
  Top Layer w10: IC1.60 1286.02,405.08 1286.02,409.62 1341.05,464.64 1341.05,507.74 1337.71,511.08 1337.71,685.23 1289.36,733.58 1286.8,733.58 1279.92,740.46 1279.92,743.62 IC1.14@1277.05,746.5 ; IC1.59 1284,854.76 1285.97,852.8 IC1.11 1304.61,763.1 1288,746.5 ; IC1.14 IC1.14@1277.05,746.5 ; IC1.49 IC1.51 ; IC1.50 IC1.57 IC1.56 IC1.55 IC1.54 ; IC1.2 IC1.1 1637,852.8 1638.97,854.76 IC1.58 ; IC1.61 1656.97,407 1655,408.97 IC1.36 IC1.37 IC1.38 IC1.39 IC1.40 IC1.41 IC1.42 ; v1(1855,912.5) 1852.5,912.5 1794.76,854.76 IC1.58 ; v1(2375,895) 2375,891.21 2365.16,881.37 2365.16,858.7 C13.1 2351.46,718.01 2358.54,710.92 C14.2 2358.54,404.74 2376,387.28 R11.1 2535,321 2527,313 2527,178 2550,155 2682.52,155 LED3.1 ; LED2.1 2680.22,454.17 ; U6.6 2749.16,655.16 2755,661 ; J1.A1 2847,509.02 2858.5,497.52 2884.08,497.52 2892.56,506 2892.56,762 2882.08,772.48 2845,772.48 2845,760.98 J1.A12 2790.98,760.98 ; R10.2 2770.52,130 2763,137.52 LED3.1 ; IC1.14@1277.05,746.5 1288,746.5 ; 1288,746.5 1336.1,746.5 IC1.54 ; IC1.54 IC1.53 IC1.52 IC1.51 ; IC1.51 IC1.42 ; IC1.42 IC1.43 IC1.44 IC1.45 IC1.46 IC1.47 IC1.48 1655,831 1656.97,832.97 IC1.58 ; 2680.22,454.17 2729,405.39 2729,166.52 LED3.1 ; 2680.22,454.17 2739.38,513.34 2739.38,593.62 2755,609.23 2755,661 ; 2755,661 2755,739.98 2776,760.98 2790.98,760.98 ; 2755,661 2768,674 2768,738 2790.98,760.98
  Bottom Layer w10: v1(1855,912.5) 1855,915 1875,935 2125,935 2245,935 2335,935 v1(2375,895)
NetC14_1: C14.1 J1.A4 LED1.2 | length 1782.2
  Top Layer w10: C14.1 2276,450 2266.19,459.81 2266.19,891.19 2315.19,940.19 2492.81,940.19 2598,835 LED1.2 2614.17,859.17 2632,877 2888,877 2908.27,856.73 2908.27,498 2892.08,481.81 2800,481.81 2792,489.81 2792,532.51 2800,540.51 J1.A4
NetIC1_16: IC1.16 SW1.1 SW1.2 | length 1496.6
  Top Layer w10: IC1.16 1277.05,683.5 1297.87,662.68 1312.32,662.68 v1(1315,660) ; v1(2280,365) 2277.32,362.32 2277.32,347.95 2270,340.63 2270,330.63 SW1.1
  Bottom Layer w10: v1(1315,660) 1610,365 2130,365 2240,365 v1(2280,365) ; SW1.1 SW1.2
NetIC1_18: IC1.18 JP1.4 | length 1095
  Top Layer w10: JP1.4 470.61,601.89 593.01,479.49 679.49,479.49 v1(715,515) ; IC1.18 1277.05,620.51 1312.32,585.24 1312.32,577.68 v1(1315,575)
  Bottom Layer w10: v1(715,515) 1255,515 v1(1315,575)
NetIC1_19: IC1.19 JP1.3 | length 1310.2
  Top Layer w10: JP1.3 603.39,633.39 v1(685,715) ; v1(1192.39,642.39) 1195.07,639.71 1210.6,639.71 1261.3,589.02 IC1.19
  Bottom Layer w10: v1(685,715) 712.91,687.09 749.49,687.09 762.91,700.51 762.91,859.7 742.09,880.51 742.09,899.49 755.51,912.91 774.49,912.91 787.91,899.49 787.91,897.21 1042.72,642.39 v1(1192.39,642.39)
NetIC1_20: IC1.20 JP1.2 | length 1385.4
  Top Layer w10: JP1.2 602.77,664.88 675.59,737.71 712.29,737.71 v1(740,710) ; v1(1195,575) 1198.22,575 1215.7,557.52 IC1.20
  Bottom Layer w10: v1(740,710) 740,860.11 726.19,873.92 726.19,906.08 748.92,928.81 781.08,928.81 803.81,906.08 803.81,903.8 835,872.61 965,742.61 1042.31,665.3 1201.88,665.3 1215.3,651.88 1215.3,595.3 v1(1195,575)
NetIC1_21: IC1.21 JP1.1 | length 1680.6
  Top Layer w10: JP1.1 414.76,696.38 419.61,701.22 419.61,749.07 465.05,794.51 465.05,847.26 510.49,892.71 758.5,892.71 761.21,890 v1(765,890) ; IC1.21 1277.05,526.02 1305.39,497.68 1315.66,497.68 v1(1318.34,495)
  Bottom Layer w10: v1(765,890) 835,820 965,690 1102.91,552.09 1204.49,552.09 1250.3,597.91 1324.49,597.91 1337.91,584.49 1337.91,565.51 1320,547.61 1316.06,547.61 1279.53,511.08 1279.53,478.92 1311.36,447.09 1374.49,447.09 1387.91,460.51 1387.91,479.49 1372.39,495 v1(1318.34,495)
NetJ1_A5: J1.A5 R11.2 | length 382.6
  Top Layer w10: R11.2 v1(2535,454) ; v1(2778,555) 2778,563.79 2800,585.79 J1.A5
  Bottom Layer w10: v1(2535,454) 2677,454 v1(2778,555)
NetLED1_1: LED1.1 R12.2 | length 388.3
  Top Layer w10: R12.2 2465,727 2488,750 2632,750 2650,768 LED1.1
NetLED2_2: LED2.2 R13.2 | length 675.5
  Top Layer w10: R13.2 v1(2290,793) ; LED2.2 v1(2665,609)
  Bottom Layer w10: v1(2290,793) 2474,609 v1(2665,609)
NetR1_2: R1.2 U1.2 U2.2 | length 1356.6
  Top Layer w10: R1.2 v1(542,165)
  Bottom Layer w10: U2.2 630.16,682 621.16,691 559,691 542,674 v1(542,165) 562,185 835,185 895.01,185 896.82,186.81 938,186.81 965,213.81 996.18,244.99 996.18,267.48 1011.89,283.19 1063.63,283.19 1090.47,256.34 1090.47,230 1102.48,217.99 U1.2
NetR3_2: R3.2 U1.3 U2.3 | length 1817
  Top Layer w10: v1(285.43,376.43) R3.2 285.43,232.35 349.83,167.96 399.83,167.96 497.78,70 v1(565,70)
  Bottom Layer w10: v1(285.43,376.43) 285.43,479.43 520,714 648,714 649.84,712.16 U2.3 ; v1(565,70) 685.65,70 698.55,82.91 815.41,82.91 903.41,170.91 944.59,170.91 1012.09,238.4 1012.09,260.89 1018.48,267.28 1057.04,267.28 1074.57,249.75 1074.57,223.41 1095.58,202.4 1096.27,202.4 1096.58,202.09 1108.78,202.09 1124.37,186.5 U1.3
NetR10_1: R10.1 U6.8 | length 719.5
  Top Layer w10: v1(2716,724) 2716,694.53 U6.8 ; v1(2778,598) 2755.09,575.09 2755.09,309.34 2870.43,194 R10.1
  Bottom Layer w10: v1(2716,724) 2778,662 v1(2778,598)
NetR12_1: R12.1 R13.1 U6.5 | length 1125.3
  Top Layer w10: R13.1 2304,652.28 2327.28,675.57 2327.28,809.52 2295,841.8 2295,894.14 2300.86,900 2320,900 2340,920 2432.14,920 2438,914.14 2438,582.28 2448,572.28 R12.1 v1(2502.72,572.28) ; v1(2716,572.28) 2716,635.47 U6.5
  Bottom Layer w10: v1(2502.72,572.28) v1(2716,572.28)
To_Lipo_Bat: C8.1 C9.1 C13.2 IC1.3 LED3.2 R9.2 U6.3 | length 3081.7
  Top Layer w10: v1(1556.57,772) IC1.3 ; R9.2 1837.72,180.98 1986.73,330 1990,330 ; v1(1855.54,771.46) C8.1 1990,636 1958,604 1958,506 1967.54,496.46 C9.1 1990,330 ; v1(2075,330) 1990,330 ; C13.2 2408.54,546 2412.27,542.27 2510.27,542.27 2530,562 2530,633.16 2552,655.16 2590.16,655.16 ; U6.3 2590.16,655.16 ; v1(2620,185) 2623.22,185 2640.7,202.48 LED3.2 2700,235 2585,350 2585,650 2590.16,655.16
  Bottom Layer w10: v1(1556.57,772) 1855,772 v1(1855.54,771.46) ; v1(2075,330) 2196.15,330 2341.15,185 v1(2620,185)
VIN: C1.2 C3.1 C6.2 R2.2 R4.1 R6.2 R7.2 R8.2 U2.8 U3.1 U3.3 U4.B1 | length 4737.3
  Top Layer w10: v1(343.77,238.77) 345.66,236.89 393.11,236.89 C3.1 421.46,235 431.46,225 582.11,225 602.71,245.59 602.71,284.23 565,321.94 v1(565,378.54) ; R4.1 R2.2 562.72,850.98 542.17,871.54 514.45,871.54 506.73,863.82 506.73,822.51 569.91,759.33 722.78,759.33 762.71,719.41 762.71,700.59 737.71,675.59 723.48,675.59 580.71,532.82 580.71,514.01 599.52,495.2 663.09,495.2 705.59,537.71 724.41,537.71 737.71,524.41 737.71,505.59 681.17,449.05 624.22,449.05 567.68,392.51 567.68,381.22 v1(565,378.54) ; v1(790,430) 786.21,430 781.21,425 v1(715,425) 695.02,405.02 695.02,395.85 677.71,378.54 C1.2 v1(565,378.54) ; v1(1350,190) 1410,130 1454.02,130 1460.4,136.38 1504.48,136.38 1529.56,111.3 1529.56,103 C6.2 1537.56,137 1522.72,151.84 1522.72,178 ; R7.2 1522.72,178 ; R6.2 1812.28,117.72 1740,190 R8.2 1687.72,178 1671.72,162 1671.72,88.28 1634.15,50.71 1624.41,40.97 1605.59,40.97 1595.85,50.71 1573.22,73.34 1573.22,129.63 1540.84,162 1538.72,162 1522.72,178
  Bottom Layer w6: 1189.09,155.91 1189.09,268.66 1231.34,310.91 1415.94,310.91 1428.19,298.66 1428.19,281.34 1367.21,220.36 1339.09,220.36 1278.11,159.38 1278.11,136.75 1278.11,124.19 1264.28,110.36 1260.36,110.36 U4.B1
  Bottom Layer w10: U3.3 207.79,157.6 228.19,178 228.19,210 205.79,232.4 ; U3.1 205.79,232.4 ; v1(343.77,238.77) 342.4,237.4 316.77,237.4 311.77,232.4 205.79,232.4 ; v1(565,378.54) 565,531.53 610.47,577 U2.8 ; v1(790,430) 1011.3,430 1173.82,267.48 1173.82,171.18 1189.09,155.91 ; 1278.11,136.75 1302.39,161.04 1321.04,161.04 v1(1350,190)
XTAL_32K_N: C12.2 IC1.13 U5.3 | length 503.5
  Top Layer w10: U5.3 1150.28,709.16 1139,720.43 C12.2 1090,755.99 1112,777.99 IC1.13
XTAL_32K_P: C11.2 IC1.12 U5.1 | length 879.3
  Top Layer w10: U5.1 1002,425.55 988,439.55 988,913.72 992,917.72 C11.2 1034,917.72 1142.23,809.49 IC1.12
pads on no net: IC1.4 IC1.6 IC1.7 IC1.9 IC1.10 IC1.15 IC1.17 IC1.22 IC1.23 IC1.24 IC1.25 IC1.28 IC1.29 IC1.30 IC1.31 IC1.32 IC1.33 IC1.34 IC1.35 J1.A6 J1.A7 J1.A8 J1.A9 J1.B5 J1.B6 J1.B7 J1.B8 J1.MH1 J1.MH2 J1.MP1 J1.MP2 J1.MP3 J1.MP4 JP1.10 JP1.11 U1.1 U1.5 U1.6 U1.7 U1.8 U1.13 U1.14 U6.1 U6.2 U6.4 U6.7 U6.9

## Polygon pours and split planes (outlines as drawn)
GND on Bottom Layer "GND_L04_P004" (solid, remove dead copper, pour order 4): 0,980 0,0 3160,0 3160,985
GND on Top Layer "GND_L01_P003" (solid, remove dead copper, pour order 3): 0,980 835,980 835,0 0,0
GND on Top Layer "GND_L01_P002" (solid, remove dead copper, pour order 2): 2250,980 2250,0 3160,0 3160,980
GND on Top Layer "GND_L01_P001" (solid, remove dead copper, pour order 1): 965,980 965,0 2120,0 2120,980
no net on Layer 2 (split plane): 3139.9,20.1 20.1,20.1 20.1,959.9 3139.9,959.9
no net on Layer 1 (split plane): 845,20.1 20.1,20.1 20.1,959.9 845,959.9
no net on Layer 1 (split plane): 3139.9,20.1 2240,20.1 2240,959.9 3139.9,959.9
no net on Layer 1 (split plane): 2130,20.1 955,20.1 955,959.9 2130,959.9